# Altium PCB PCB_01.PcbDoc
Units mil, origin at the board's own origin, x right, y up, seen from the top; angles counter-clockwise.
Board outline 2075.03 x 1050.03 mil, 2 copper layers (Top Layer, Bottom Layer); 8 components, 4 nets, 21 pads, 1 vias.
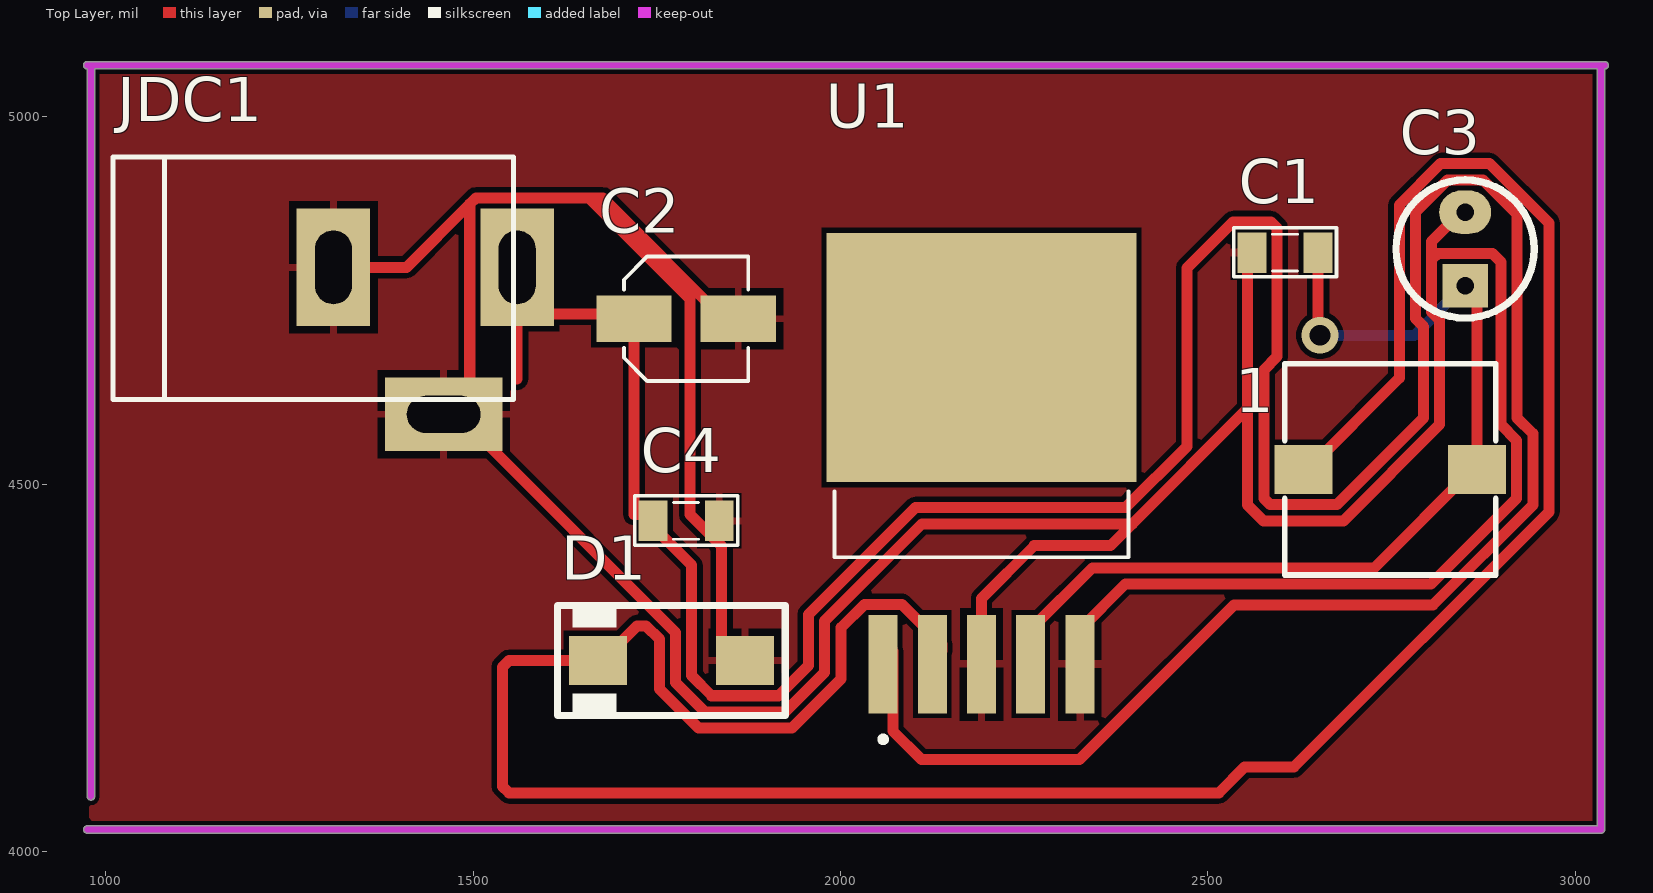
[diagram p0: Top Layer view]
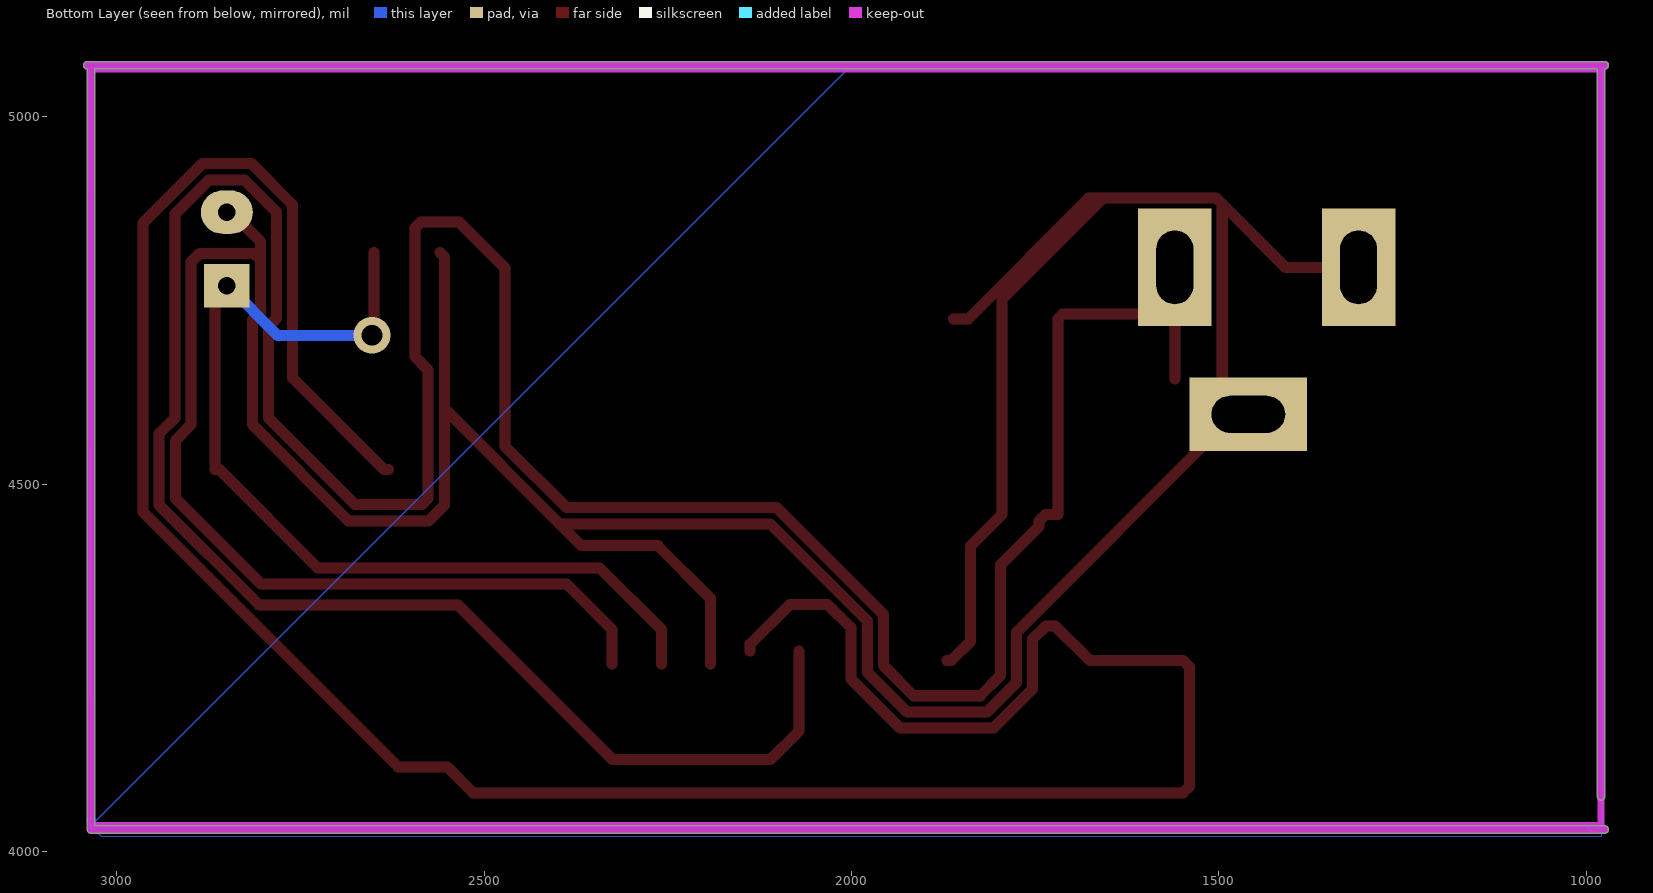
[diagram p1: Bottom Layer view, seen from below]

## Layer stack, top to bottom
Top Solder: solder mask 0.4, Solder Resist, Dk 3.5
Top Layer: signal copper 1.4
Dielectric 1: dielectric 12.6, FR-4, Dk 4.8
Bottom Layer: signal copper 1.4
Bottom Solder: solder mask 0.4, Solder Resist, Dk 3.5

## Board outline
975,4024.99 cw(c975,4030) 975,4035.01 3029.99,4035.01 3029.99,5064.98 985.01,5064.98 985.01,4075 cw(c980,4075) 974.99,4075 974.99,5064.98 cw(c975,5070) 975,5075.02 3040,5075.02 cw(c3040,5070) 3045.01,5070 cw(c3040,5070) 3040.01,5064.98 3040.01,4030 cw(c3035,4030) 3035,4024.99

## Design rules (kind name [scope] priority, off if disabled: settings)
Clearance [All] p1: gap=7 ignorepadtopadclearanceinfootprint=FALSE
PolygonConnect [All] p1: connectstyle=Relief reliefconductorwidth=10 reliefentries=4 polygonreliefangle="90 Angle" airgapwidth=10
RoutingVias [All] p1: holewidth=14 width=30 viastyle="Through Hole" minholewidth=14 minwidth=30 maxholewidth=28 maxwidth=50
SolderMaskExpansion [All] p1: expansion=4 istentingtop=FALSE
Width [All] p1: maxlimit=40 minlimit=7 preferedwidth=15
30 further rules are at their usual default settings.

## Components (designator, comment, footprint, x,y, rotation, side; value= is the part's Value field where it differs from the comment)
1 "150mH" L-SMD-M-7.3x4.5 2748.11,4520 r90 top value="150 mH"
C1 "Capacitor Ceramic 2KV" CAP_0805 2605,4815 r180 top
C2 "680uF,18V" CAP-ALU-SMD-4.5x5x1.4 1790,4725 r0 top value=104
C3 "CAP-ALU-DIP" CA-ALU-2.54 2850,4820 r90 top value=104
C4 "Capacitor Ceramic 2KV" CAP_0805 1790,4450 r180 top
D1 "1N5822" SMA 1770,4260 r180 top value="Diode c?m 1N5408"
JDC1 "Jac DC" DC-IN 1435,4695 r0 top
U1 "LM2976" VREG_LM2596S-ADJ/NOPB 2191.93,4672.32 r90 top

## Footprints (in the part's own frame and the unit in brackets; to place one, negate y for a bottom-side part, rotate by r counter-clockwise, add the part's x,y. Pads: shape width x height; smd on the part's side, far side on the other; paste and mask are expansions set on the pad)
CA-ALU-2.54 [mm]
  rect 1.5x1.58 hole 0.6: 1(-1.27,0)
  oval 1.5x1.8 hole 0.6: 2(1.27,0)
  silkscreen extent -2.39,-2.39 2.39,2.39, body extent -2,-2.03 1.99,1.97, height 7.01
CAP-ALU-SMD-4.5x5x1.4 [mm]
  rect 2.6x1.6 smd: 1(-1.8,0) 2(1.8,0)
  silkscreen extent -2.15,-2.15 2.15,2.15, body extent -2.5,-2.15 2.5,2.15, height 5.45
CAP_0805 [mil]
  rect 39.37x55 smd: 1(-45,0) 2(45,0)
  silkscreen extent -70,-34 70,33, body extent -40,-25 40,25, height 24
DC-IN [mil] "Jac DC input"
  rect 100x160 hole 50 slot 100 at 90 deg: 1(125,100) 2(-125,100)
  rect 160x100 hole 50 slot 100 at 0 deg: 3(25,-100)
  silkscreen extent -425,-80 120,250, body extent -410,-105 134,269, height 434
L-SMD-M-7.3x4.5 [mm] "WE-PDA SMD Shielded Power Inductor, 7345"
  rect 1.7x2 smd: 1(0,3) 2(0,-3)
  silkscreen extent -3.65,-3.65 3.65,3.65, body extent -3.65,-3.65 3.65,3.65, height 4.05
SMA [mm]
  rect 2x1.7 smd: 1(-2.544,0) 2(2.544,0)
  silkscreen extent -3.94,-1.9 3.94,1.91, body extent -2.87,-1.4 2.87,1.4, height 2.29
VREG_LM2596S-ADJ/NOPB [mm]
  rect 3.4x1 smd paste-0.05 mask+0.07: 1(-10.6,3.4) 2(-10.6,1.7) 3(-10.6,0) 4(-10.6,-1.7) 5(-10.6,-3.4)
  rect 8.6x10.7 smd paste-0.05 mask+0.07: 6(0,0)
  silkscreen extent -13.3,-5.08 -4.62,5.08, body extent -7.18,-5.08 7.18,5.08, height 4.65

## Part data
1: library part Inductor, "Inductor"
C1 C4: library part Cap2KV, LatestRevisionDate=17-Jul-2002, LatestRevisionNote="Re-released for DXP Platform.", PackageReference=RAD-0.3, Published=8-Jun-2000, Publisher="Altium Limited"
C2: library part CAP-ALU-DIP, "Capacitor (Semiconductor SIM Model)", LatestRevisionDate=17-Jul-2002, LatestRevisionNote="Re-released for DXP Platform.", PackageReference=C1206, Publisher="Altium Limited"
C3: "Capacitor (Semiconductor SIM Model)", LatestRevisionDate=17-Jul-2002, LatestRevisionNote="Re-released for DXP Platform.", PackageReference=C1206, Publisher="Altium Limited"
D1: "Schottky Rectifiers"
JDC1: library part DCIN, "Jac DC input"
U1: library part LM2596, Max Input Voltage="12 V", Max Output Current="3 (6.0 peak) A", Max Output Voltage=mV, Temperature Range="-40 to +125 degC", Category=IC-Power, Min Input Voltage=mV, Min Output Voltage=mV, Mounting Technology="Surface Mount", Status=Unreleased, Supply Voltage=mV

## Via types
v1: diameter 50, hole 28, Top Layer to Bottom Layer, 1 vias

## Nets (pads, with @x,y where several pads share a name; then routed paths per layer and width w, separated by ;. In a path a pad name is that pad's centre, name@x,y a point inside that pad or via, vN(x,y) a via of type N, cw(c..) or ccw(c..) an arc to the next point about the centre after c; other vN are vias at no path point)
3.3V: 1.2 C1.1 C3.1 U1.4 | length 1344.1
  Top Layer w15: U1.4 2258.86,4302.24 2342.61,4386 2726.31,4386 2860.31,4520 1.2 2866.22,4753.78 C3.1 ; C1.1 2650,4705 v1(2652.5,4702.5) v1@2655,4700
  Bottom Layer w15: v1(2652.5,4702.5) 2780.93,4702.5 2848.43,4770 C3.1
12V: C2.1 C4.2 JDC1.1 U1.1 | length 4771.5
  Top Layer w15: 1560,4642.82 JDC1.1@1560,4774.08 ; JDC1.1 JDC1.1@1560,4774.08 ; U1.1@2071.14,4272.68 2071.14,4163.86 2110,4125 2325,4125 2535.26,4335.26 2805.94,4335.26 2942.09,4471.42 2942.09,4568.58 2920.71,4589.96 2920.71,4867.46 2874.14,4914.03 2825.86,4914.03 2782.4,4870.57 2782.4,4725.35 2793.31,4714.45 2793.31,4589.96 2675.38,4472.04 2584.62,4472.04 2576.13,4480.53 2576.13,4655.49 2594.19,4673.55 2594.19,4848.51 2585.69,4857 2534.31,4857 2471.44,4794.13 2471.44,4551.4 2388.1,4468.06 2101.79,4468.06 1956.51,4322.79 1956.51,4253.01 1915.53,4212.04 1824.78,4212.04 1797.51,4239.31 1797.51,4389.68 1745,4442.19 C4.2 1736.21,4458.79 1719.13,4458.79 C2.1 1712.55,4731.58 1602.5,4731.58 JDC1.1@1560,4774.08
GND: C1.2 C2.2 C3.2 C4.1 D1.1 JDC1.2 JDC1.3 U1.3 U1.5 | length 5624.9
  Top Layer w15: JDC1.2 1409.49,4795 1495.5,4881.01 ; C2.2 1841.18,4725 1676.68,4889.5 1657.82,4889.5 ; D1.1 1864.25,4260 1838.29,4285.96 1838.29,4415.6 1823.35,4430.54 1795.18,4458.7 1795.18,4752.13 1657.82,4889.5 ; U1.3 2191.93,4344.43 2263.67,4416.17 2367.32,4416.17 2397.21,4446.06 ; U1.5 2325.79,4302.24 2387.54,4364 2803.56,4364 2920.09,4480.53 2920.09,4559.47 2898.71,4580.85 2898.71,4802.43 2887.11,4814.03 2812.89,4814.03 2804.4,4805.53 ; C1.2 2554.13,4809.13 2554.13,4602.98 ; C3.2 2844.09,4870 2804.4,4830.3 2804.4,4805.53 ; 1495.5,4881.01 1495.5,4578.14 1775.51,4298.13 1775.51,4230.19 1815.67,4190.04 1924.65,4190.04 1978.51,4243.9 1978.51,4313.68 2110.9,4446.06 2397.21,4446.06 ; 1495.5,4881.01 1503.99,4889.5 1657.82,4889.5 ; 2397.21,4446.06 2554.13,4602.98 ; 2554.13,4602.98 2554.13,4471.42 2575.51,4450.04 2684.49,4450.04 2815.31,4580.85 2815.31,4723.56 2804.4,4734.47 2804.4,4805.53
Net1_1: 1.1 D1.2 U1.2 | length 3680.3
  Top Layer w15: U1.2@2138.07,4272.68 2138.07,4282.12 2083.76,4336.43 2032.38,4336.43 2000.51,4304.56 2000.51,4234.79 1933.76,4168.04 1806.56,4168.04 1753.51,4221.08 1753.51,4289.02 1735.35,4307.18 1722.93,4307.18 1675.75,4260 1548.79,4260 1540,4251.21 1540,4088.79 1548.79,4080 2515,4080 2550,4115 2616.79,4115 2964.09,4462.3 2964.09,4855.19 2883.25,4936.03 2816.75,4936.03 2760.4,4879.68 2760.4,4644.49 2635.91,4520 1.1
pads on no net: U1.6

## Polygon pours and split planes (outlines as drawn)
GND on Top Layer "GND_L01_P000" (solid, remove dead copper, pour order 0): 992.5,5070 3040,5070 3040,4030 3035,4025 3027.5,4032.5 977.5,4032.5
no net on Bottom Layer "NONET_L02_P001" (solid, remove dead copper, pour order 1): 3037.5,5067.5 977.5,5067.5 980,5065 980,4020 3020,4020 3035,4035 3035,4030 3035,4035 3040,4040 3040,4045 3030,4045 3030,4040 2002.5,5067.5 977.5,5067.5 977.5,4037.5 990,4025 1000,4035 3035,4035 2005,5065 980,5065 980,4035 3035,4035

## Keep-outs
Bottom Layer:
  lines w10: 975,4030 980,4035 ; 980,4075 980,4035 ; 1010,5070 975,5070 980,5065 ; 3040,5070 3035,5065 ; 980,4035 980,5065 ; 980,4035 3035,4035 3035,5065 ; 980,5065 3035,5065
Keep-Out Layer:
  lines w10: 975,4030 3035,4030 3035,5065 ; 975,5070 3040,5070 ; 980,4075 980,5065